# Altium PCB USB2aer_def.PCBDOC (part 2 of 3)
Units mm, origin at the board's own origin, x right, y up, seen from the top; angles counter-clockwise.
Board outline 194.75 x 143.65 mm, 2 copper layers (TopLayer, BottomLayer); 106 components, 195 nets, 863 pads, 225 vias.
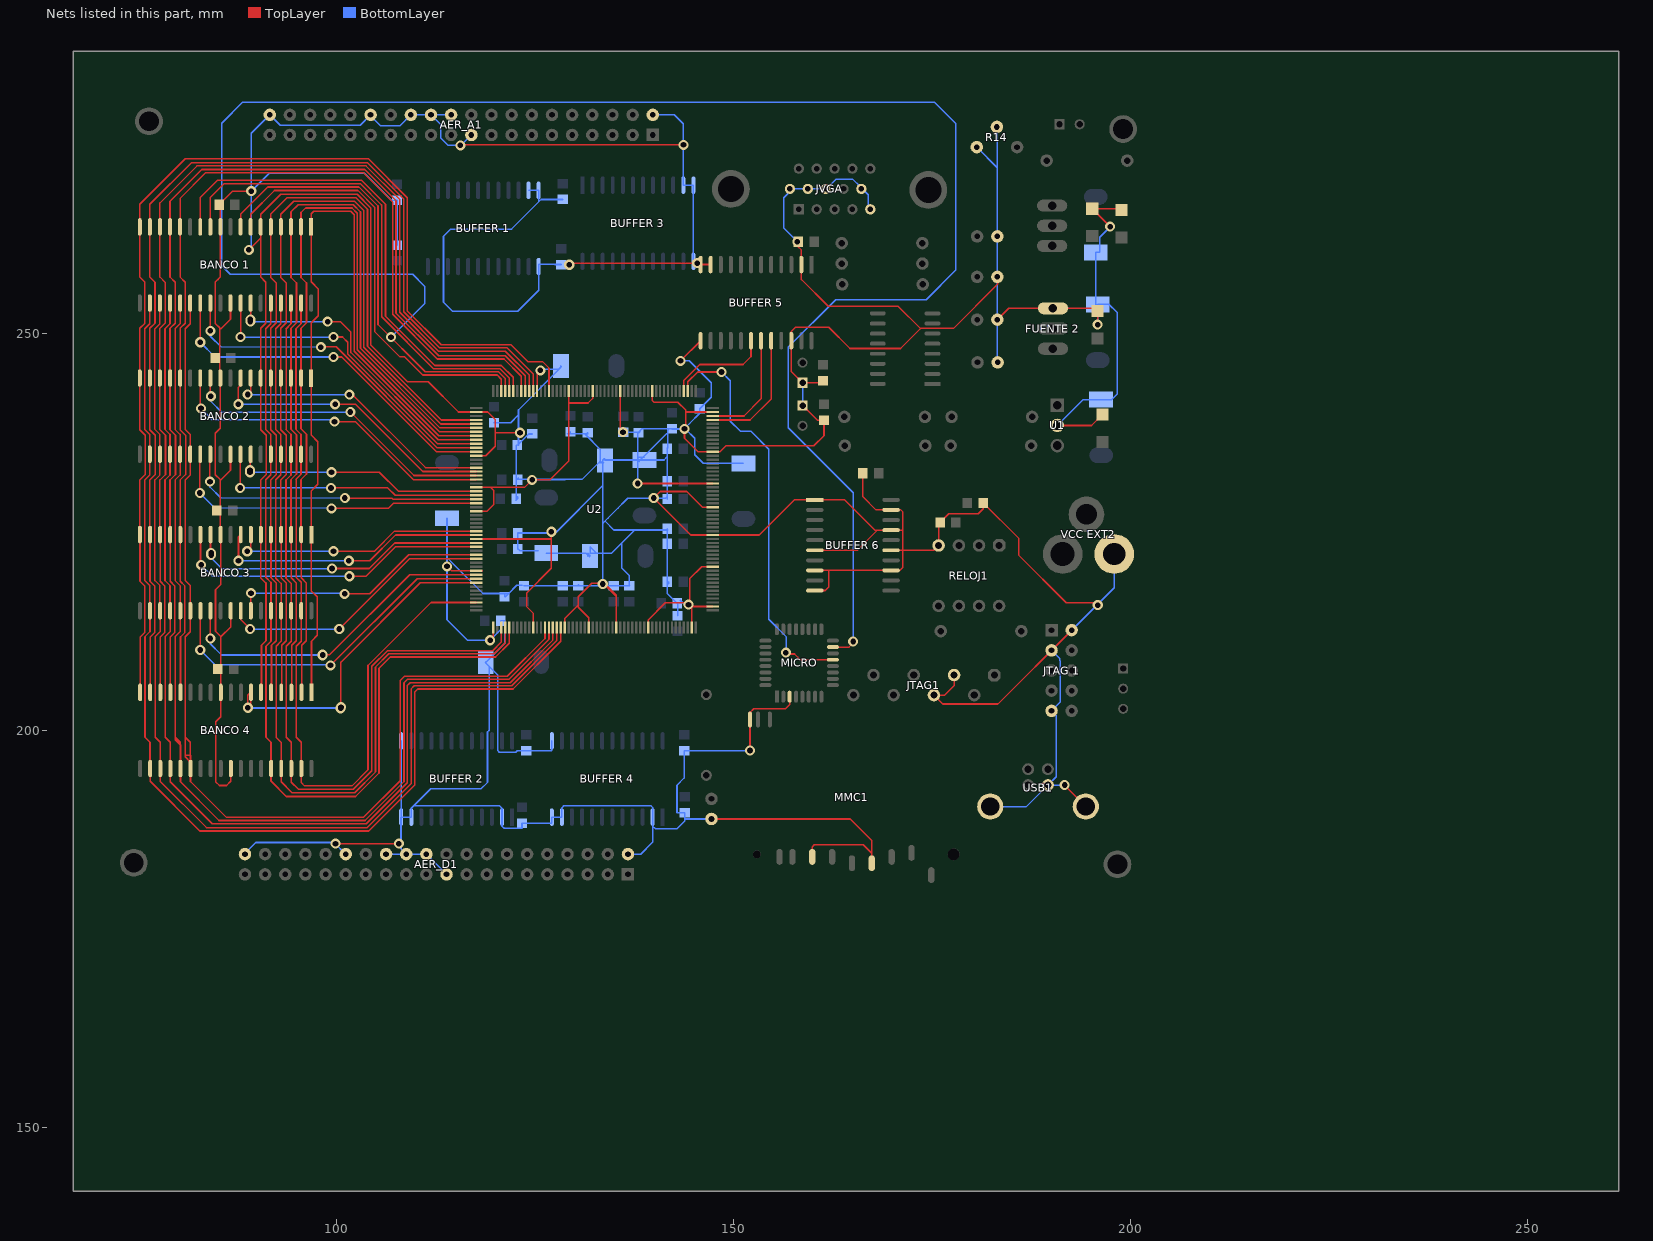
[diagram p2: the nets of this part, all layers, seen from the top]

## Via types
v1: diameter 1.27, hole 0.711, TopLayer to BottomLayer, 225 vias

## Nets (pads, with @x,y where several pads share a name; then routed paths per layer and width w, separated by ;. In a path a pad name is that pad's centre, name@x,y a point inside that pad or via, vN(x,y) a via of type N, cw(c..) or ccw(c..) an arc to the next point about the centre after c; other vN are vias at no path point) (continued)
GND: "BANCO 1.6" "BANCO 1.10" "BANCO 1.28" "BANCO 2.6" "BANCO 2.10" "BANCO 2.28" "BANCO 3.6" "BANCO 3.10" "BANCO 3.28" "BANCO 4.6" "BANCO 4.10" "BANCO 4.28" "BUFFER 1.11" "BUFFER 1.12" "BUFFER 1.13" "BUFFER 2.2" "BUFFER 2.11" "BUFFER 2.12" "BUFFER 2.13" "BUFFER 3.11" "BUFFER 3.12" "BUFFER 3.13" "BUFFER 4.2" "BUFFER 4.11" "BUFFER 4.12" "BUFFER 4.13" "BUFFER 5.2" "BUFFER 5.11" "BUFFER 5.12" "BUFFER 5.13" "BUFFER 5.22" "BUFFER 6.1" "BUFFER 6.6" "BUFFER 6.8" "BUFFER 6.10" "BUFFER 6.13" "BUFFER 6.15" "BUFFER 6.17" "BUFFER 6.19" "C ADJ1.2" "FUENTE 2.1" "JTAG 1.2" "JTAG 1.3" "JTAG 1.9" "RESET FPGA1.1" "VCC EXT2.2" AER_A1.2 AER_A1.19 AER_A1.22 AER_A1.24 AER_A1.26 AER_A1.30 AER_A1.40 AER_D1.2 AER_D1.19 AER_D1.22 AER_D1.24 AER_D1.26 AER_D1.30 AER_D1.40 C2G1.2 C2G2.2 C2G3.2 C2G4.2 C2P1.2 C2P2.2 C2P3.2 C2P4.2 C2P5.2 C2P6.2 C2P7.2 C2P8.2 C2P9.2 C2P10.2 C2P11.2 C2P12.2 C3G1.2 C3G2.2 C3G3.2 C3G4.2 C3P1.2 C3P2.2 C3P3.2 C3P4.2 C3P5.2 C3P6.2 C3P7.2 C3P8.2 C3P9.2 C3P10.2 C3P11.2 C3P12.2 C3P13.2 C3P14.2 C3P15.2 C3P16.2 C6.2 C48.2 C49.2 C50.2 C51.2 C52.2 C53.2 C54.2 C55.2 C56.2 C57.2 C58.2 C59.2 C60.2 C61.2 C62.2 C63.2 C64.2 C65.2 C66.2 C67.2 C68.2 C69.2 C70.2 D1.K D2.K D3.K D4.K D5.K JTAG1.3 JTAG1.4 JVGA.5 JVGA.6 JVGA.7 JVGA.8 JVGA.10 MICRO.3 MMC1.3 MMC1.6 MMC1.10 R14.1 R14.3 RELOJ1.4 RESET1.1 U1.3 U2.1 U2.11 U2.19 U2.25 U2.32 U2.40 U2.51 U2.54 U2.64 U2.72 U2.79 U2.85 U2.93 U2.103 U2.116 U2.124 U2.131 U2.137 U2.145 U2.158 U2.169 U2.177 U2.183 U2.190 U2.198 USB1.4 USB1.5 USB1.6 | length 1483.3
  TopLayer w0.2: 115.716,220.116 U2.198@118.309,220.116 ; U2.190@117.595,224.116 126.316,224.116 ; U2.183@117.595,227.616 118.941,227.616 119.8,228.475 119.8,230.225 119.409,230.616 ; U2.177@117.595,230.616 119.409,230.616 ; U2.169@117.595,234.616 118.791,234.616 119.975,235.8 119.975,237.5 ; U2.158@117.595,240.116 119.034,240.116 119.975,239.175 119.975,237.5 ; v1(123.1,237.5) 119.975,237.5 ; v1@124.6,231.6 v1@124.624,231.624 ; v1(124.625,231.575) 124.6,231.55 123.666,230.616 119.409,230.616 ; U2.11@124.745,212.966 124.745,214.78 123.925,215.6 123.925,217.275 125.475,218.825 ; U2.145@125.245,242.766 125.245,244.955 125.245,245.364 125.245,245.53 v1@125.275,245.5 ; 125.475,218.85 127.05,220.425 127.05,224.116 127.05,224.85 127.1,224.9 127.137,224.937 v1@127.15,224.95 ; v1@127.05,224.95 v1(127.05,225.025) ; U2.19@128.745,212.966 128.745,214.095 130.45,215.8 ; 129.245,236.245 129.245,241.25 U2.137@129.245,242.766 ; U2.25@131.745,212.966 131.745,214.205 130.45,215.5 130.45,215.8 ; v1@133.225,218.625 133.475,218.625 133.588,218.513 135.245,216.855 U2.32@135.245,212.966 ; v1@133.25,218.55 132.15,218.55 130.45,216.85 130.45,215.8 ; U2.40@139.245,212.966 139.245,213.92 141.395,216.07 144.325,216.07 144.505,216.07 144.525,216.05 144.7,215.875 144.745,215.83 144.745,215.616 U2.51@144.745,212.966 ; U2.116@139.745,242.766 139.745,241.58 139.975,241.35 142.975,241.35 144,240.325 v1@144,238.075 ; v1@144.5,216.075 144.5,219.125 145.991,220.616 U2.64@147.395,220.616 ; U2.72@147.395,224.616 144.609,224.616 v1(139.95,229.275) 140.775,230.1 144.1,230.1 146.084,228.116 U2.79@147.395,228.116
  TopLayer w0.203: C61.2@84.675,246.925 C61.2@85.25,246.925 ; 84.709,233.172 84.709,237.439 85.345,238.075 85.345,244.4 85.25,244.495 C61.2@85.25,246.925 ; C62.2@84.875,227.7 85.344,227.7 85.344,231.572 84.7,232.216 84.7,232.22 ; C63.2@85,207.725 C63.2@85.37,207.725 ; C60.2@85.1,266.25 85.137,266.213 C60.2@85.345,266.005 ; C60.2@85.175,266.25 86.87,267.945 v1(89.23,267.945) ; 85.25,250.75 85.25,250.72 ; 85.325,238.075 84.7,237.45 84.7,232.22 ; 85.325,257.125 84.7,256.5 ; 85.345,231.605 85.345,231.575 ; C60.2@85.345,266.08 C60.2@85.345,266.005 ; C60.2@85.345,266.25 C60.2@85.345,266.294 ; 85.37,205.625 C63.2@85.37,207.725 ; 85.37,211.88 85.37,211.85 ; 86.615,234.8 86.615,232.765 85.425,231.575 85.403,231.597 85.367,231.597 85.345,231.575 ; 86.615,253.85 86.615,251.815 85.425,250.625 85.345,250.625 85.25,250.72 ; 86.64,215.075 86.64,213.04 85.391,211.791 ; 86.661,195.197 86.661,193.586 86.125,193.05 85.225,193.05 84.775,193.5 84.775,201.1 85.391,201.716 85.391,204.797 85.391,207.725 85.391,211.791 ; v1@89.025,260.65 90.425,262.05 ; 90.425,225.3 90.425,231.555 91.12,232.25 91.12,237.2 90.425,237.895 90.425,244.35 ; 90.425,244.4 90.425,250.655 91.075,251.305 91.075,256.475 90.425,257.125 90.425,262.05 ; 90.45,224.675 90.45,219.17 91.095,218.525 ; 90.471,204.797 90.52,204.797 90.52,210.725 91.095,211.3 91.095,218.525 ; 91.095,218.575 91.095,218.525 ; v1(99.85,185.725) v1(107.825,185.725) ; v1(113.9,220.675) 114.459,220.116 U2.198@117.575,220.116 ; v1@115.65,273.775 v1(143.7,273.775) ; U2.190@117.595,224.116 127.05,224.116 ; U2.158@117.7,240.116 U2.158@117.595,240.116 115.35,240.116 111.521,243.945 108.911,243.945 104.3,248.556 104.3,265.825 102.575,267.55 92.95,267.55 90.425,265.025 90.425,263.45 90.425,262.05 ; v1(119.329,211.353) 119.745,211.769 U2.1@119.745,212.966 ; v1@124.6,231.55 124.6,231.575 v1@124.6,231.597 ; v1@124.6,231.6 v1@124.6,231.597 ; v1@125.245,244.955 v1(125.654,245.364) 125.411,245.364 v1@125.245,245.53 ; 125.475,218.825 125.475,218.85 ; v1@127.05,224.95 v1@127.1,224.9 ; v1@127.138,224.938 v1@127.142,224.942 ; U2.137@129.245,242.766 129.245,241.25 ; v1@129.325,258.85 v1@145.45,258.85 ; U2.131@132.245,242.766 132.245,241.82 131.675,241.25 129.245,241.25 ; v1@133.225,218.625 v1@133.25,218.6 ; v1@133.528,218.745 133.674,218.599 135.245,217.028 135.245,216.855 U2.32@135.245,212.966 ; U2.124@135.745,242.766 135.745,237.88 v1@136.1,237.525 ; v1(137.925,231.116) U2.85@147.395,231.116 ; v1@143.3,246.545 145.855,249.1 ; v1@143.919,237.975 143.967,238.023 143.977,238.023 v1@144,238 ; v1@143.975,238.15 v1(143.823,237.998) 143.823,236.827 145.534,235.116 148.301,235.116 148.678,235.493 149.049,235.864 160.122,235.864 161.4,237.143 C6.2@161.4,239.1 160.55,239.1 158.725,240.925 ; 144,240.1 144.016,240.116 U2.103@147.395,240.116 ; v1(144.325,215.85) 144.559,215.616 144.745,215.616 U2.54@147.395,215.616 ; v1@145.855,258.7 147.125,258.7 ; D1.K@147.225,188.835 164.721,188.835 167.425,186.131 167.425,184.506 ; U2.72@147.395,224.616 153.238,224.616 157.672,229.05 163.978,229.05 167.788,225.24 171.335,225.24 ; v1(152.07,197.46) 152.075,197.465 MMC1.10@152.075,201.375 152.075,202.25 152.55,202.725 156.55,202.725 157.075,203.25 MICRO.3@157.075,204.25 ; C48.2@158.175,261.575 158.175,260.908 158.555,260.528 158.555,256.82 161.925,253.45 170.74,253.45 173.557,250.632 ; MMC1.6@159.925,184.065 159.925,185.318 160.179,185.572 166.358,185.572 167.425,184.506 ; 160.25,217.62 161.545,217.62 162.025,218.1 162.025,220.16 ; 160.25,220.16 169.85,220.16 170.96,220.16 171.35,220.55 171.35,227.524 171.094,227.78 167.959,227.78 166.275,229.464 C55.2@166.275,232.4 ; 160.25,222.7 165.6,222.7 165.699,222.799 168.14,225.24 ; C51.2@161.277,243.891 C51.2@161.277,244.053 161.024,243.8 RESET1.1@158.7,243.8 157.285,245.215 157.285,250.26 157.825,250.8 162,250.8 164.675,248.125 171.05,248.125 173.575,250.65 177.725,250.65 183.275,256.2 D4.K@183.275,257.15 ; MMC1.3@167.425,183.265 167.425,184.506 ; 169.85,222.7 175.255,222.7 RELOJ1.4@175.855,223.3 175.855,226.03 C64.2@176.025,226.2 177.107,227.282 180.832,227.282 181.475,227.925 181.475,228.675 181.488,228.662 185.921,224.229 185.921,222.087 191.925,216.083 195.592,216.083 v1(195.9,215.775) ; JTAG1.3@177.795,206.975 177.795,205.638 176.592,204.435 JTAG1.4@175.255,204.435 176.363,203.327 183.317,203.327 192.615,212.625 ; D3.K@183.24,251.75 184.665,253.175 190.25,253.175 195.529,253.175 C66.2@195.875,252.829 195.885,252.829 v1(195.885,251.13) ; U1.3@190.8,238.425 195.121,238.425 C69.2@196.475,239.779 ; v1@191.68,193.11 USB1.6@194.39,190.4 ; v1(197.46,263.469) 195.2,265.729 196.317,265.729 196.322,265.735 198.875,265.735 C65.2@198.875,265.554 ; 84.7,232.22 85.345,231.575 ; 84.7,256.5 84.7,251.27 85.25,250.72 ; 84.7,256.5 85.019,256.819 85.039,256.819 85.345,257.125 85.345,263.45 C60.2@85.345,266.005 ; C61.2@85.25,246.925 85.25,250.72 ; 85.345,231.575 85.345,227.7 85.345,225.35 85.37,225.325 85.37,224.675 85.37,218.35 85.35,218.35 84.725,217.725 84.725,212.495 85.37,211.85 ; C63.2@85.37,207.725 85.37,211.77 ; 85.37,211.77 85.391,211.791 ; 85.37,211.77 85.37,211.85 ; 85.37,211.85 85.391,211.829 85.391,211.791 ; v1@124.6,231.597 124.625,231.597 126.924,231.597 126.924,231.623 129.245,233.944 129.245,241.25
  BottomLayer w0.2: AER_D1.40@88.44,184.4 88.44,184.515 89.8,185.875 99.665,185.875 AER_D1.30@101.14,184.4 ; v1(88.925,260.55) 89.23,260.855 v1(89.23,267.945) ; 91.565,270.225 103.483,270.225 106.883,266.825 C49.2@107.6,266.825 107.6,263.982 C57.2@107.6,261.15 ; 91.565,270.279 v1(89.23,267.945) ; AER_D1.30@101.17,184.37 AER_D1.30@101.175,184.375 ; AER_D1.26@106.22,184.4 AER_D1.24@108.76,184.4 ; 108.1,189.075 108.1,185.06 AER_D1.24@108.76,184.4 ; 108.13,189.052 109.4,189.052 109.4,189.075 109.4,190.195 109.705,190.5 ; 108.13,189.075 108.13,198.675 ; AER_A1.24@111.885,277.565 113.1,276.35 113.1,274.65 114.025,273.725 v1(115.575,273.725) ; AER_D1.19@113.84,181.86 AER_D1.22@111.3,184.4 AER_D1.24@108.76,184.4 ; 113.9,222.75 113.9,213.925 116.444,211.381 v1@119.357,211.381 ; AER_A1.22@114.35,277.565 AER_A1.22@114.388,277.603 ; AER_A1.22@114.425,277.565 AER_A1.26@109.345,277.565 107.975,276.195 105.505,276.195 104.265,277.435 AER_A1.30@104.265,277.565 102.95,276.25 92.88,276.25 AER_A1.40@91.565,277.565 89.23,275.23 v1(89.23,267.945) ; 114.917,220.758 118.429,217.246 C3P13.2@121.15,217.246 ; v1@115.665,273.725 AER_A1.19@116.965,275.025 ; C2G1.2@118.775,208.625 C2G1.2@118.775,208.55 ; v1(119.329,211.353) 120.675,212.699 C3P14.2@120.675,213.825 121.15,213.825 121.15,210.925 118.813,208.587 118.8,208.575 C2G1.2@118.775,208.55 ; C3P1.2@119.825,238.775 121.92,238.775 122.911,239.766 ; C3P1.2@119.85,238.8 C3P1.2@119.975,238.925 ; C3P15.2@122.575,228.975 122.7,229.1 122.825,229.225 122.825,229.425 C3P15.2@122.6,229.2 ; C3P15.2@122.6,229.125 C3P15.2@122.6,229.2 ; C3P16.2@122.775,235.95 122.6,235.95 122.6,231.6 C3P15.2@122.6,229.2 ; C2P10.2@122.825,222.85 122.825,222.87 C2P10.2@122.84,222.885 ; C2P12.2@122.875,231.8 122.75,231.675 122.7,231.625 122.825,231.625 123.746,231.625 ; C3P16.2@122.875,235.95 122.875,236.025 C3P16.2@122.911,236.061 ; C3P16.2@122.911,235.95 C3P16.2@122.911,236.061 ; v1(123.1,237.5) 123.15,237.55 v1@123.15,237.5 ; C3P12.2@123.35,218.275 122.7,218.275 C3P13.2@121.671,217.246 ; C3P12.2@123.6,218.2 C2P9.2@128.475,218.2 C3P11.2@130.425,218.2 ; 124.175,268.05 124.175,268.046 125.445,268.046 ; v1(124.625,231.575) 127.784,231.575 ; C3P2.2@124.65,237.35 124.2,237.35 C3P16.2@122.911,236.061 ; v1@125.125,245.35 v1@125.269,245.494 ; v1@125.225,245.575 v1@125.263,245.537 ; v1@125.269,245.364 v1@125.269,245.494 ; v1@125.275,245.5 v1@125.269,245.494 ; C3G1.2@125.4,222.625 123.1,222.625 122.85,222.875 C2P10.2@122.84,222.885 ; 125.445,266.593 125.445,268.046 ; 125.445,268.05 125.445,268.046 ; v1@125.575,245.425 125.584,245.434 v1@125.65,245.5 ; v1@126.009,245.72 v1@125.79,245.5 ; C3G1.2@126.399,222.334 131.416,222.334 C3G4.2@131.641,222.109 ; v1(127.05,225.025) 127.1,224.975 v1@127.65,224.975 ; 127.105,198.675 127.105,197.45 C58.2@123.9,197.45 122.749,197.45 122.555,197.256 120.498,197.256 120.269,197.485 120.269,207.006 C2G1.2@119.228,208.047 ; 127.762,231.597 127.784,231.575 ; C2G3.2@128.245,245.925 C2G3.2@128.245,245.795 ; C56.2@128.275,258.7 127.457,258.7 127.433,258.724 125.445,258.724 125.445,258.45 125.445,255.448 122.803,252.806 114.605,252.806 113.462,253.949 113.462,262.255 114.376,263.169 122.022,263.169 125.752,266.9 C50.2@128.475,266.9 ; C2G3.2@128.3,245.85 C2G3.2@128.245,245.795 ; 128.375,189.075 128.375,189.078 ; C2P1.2@129.025,237.375 C2P1.2@129.45,237.375 ; C2P1.2@129.45,237.625 C2P1.2@129.45,237.375 ; C3P11.2@130.45,218.225 C3P11.2@130.425,218.2 ; C3P11.2@130.475,218.375 130.425,218.375 C3P11.2@130.425,218.2 ; C3P3.2@131.6,237.525 C3P3.2@131.625,237.525 131.625,237.35 131.6,237.375 C3P3.2@131.255,237.375 ; C3G4.2@131.641,221.975 C3G4.2@131.641,222.109 ; C3G4.2@131.875,221.875 131.838,221.913 C3G4.2@131.641,222.109 ; C3G4.2@131.925,222.05 131.641,222.334 C3G4.2@131.641,222.109 ; v1@133.25,218.55 v1@133.25,218.6 ; C3G2.2@133.375,233.775 C3G2.2@133.225,233.925 ; v1@133.528,218.745 133.528,222.325 ; C3G2.2@133.675,233.7 C3G2.2@133.528,233.7 ; C3G2.2@133.8,234.025 133.8,234.075 C3G3.2@137.925,234.075 ; C3G2.2@133.8,234.25 133.725,234.25 133.65,234.175 133.528,234.053 133.528,234.025 C3G2.2@133.528,233.7 ; 135.941,223.52 135.941,220.416 136.85,219.507 C2P7.2@136.85,218.2 ; C2P2.2@136.1,237.575 138.025,237.575 C2P3.2@138.05,237.575 ; AER_D1.2@136.7,184.4 138.305,184.4 139.805,185.9 139.805,187.96 ; C2P7.2@136.95,218.2 C2P7.2@136.85,218.2 ; v1(137.925,231.116) C3G3.2@137.925,234.075 ; C3G3.2@138.1,233.875 138.075,233.9 C3G3.2@138.25,234.075 ; C2P3.2@138.11,237.515 138.063,237.562 C2P3.2@138.05,237.575 ; C2P3.2@138.175,237.575 C2P3.2@138.05,237.575 ; C3G3.2@138.775,234.425 C3G3.2@138.6,234.425 ; AER_A1.2@139.825,277.565 142.535,277.565 143.675,276.425 143.675,268.7 144.945,268.7 v1@144.945,259.1 ; 140.919,225.247 137.547,225.247 ; 141.563,237.388 C3G3.2@138.6,234.425 ; C2P5.2@141.65,225.4 C2P5.2@141.65,225.25 ; C3P7.2@141.65,229.15 141.656,229.15 C2P4.2@141.656,231.4 ; C2P4.2@141.65,231.4 C2P4.2@141.655,231.4 ; C3P4.2@141.8,237.875 141.7,237.775 141.7,235.6 141.655,235.555 C3P6.2@141.655,235.486 141.655,234.493 ; C3P8.2@141.834,218.725 141.834,218.466 C3P8.2@141.65,218.65 ; C3P4.2@142.125,238 C2P3.2@138.475,238 ; C3P4.2@142.25,237.975 143.95,237.975 145.125,236.8 145.125,234.725 146.2,233.65 C2G4.2@151.15,233.65 ; C3P4.2@142.25,238.025 138.5,238.025 C2P3.2@138.475,238 ; C3P10.2@142.95,214.475 142.95,216.025 142.979,216.054 C3P9.2@143,216.075 ; C3P9.2@143.282,216.382 143.589,216.075 ; v1(143.319,246.564) 144.436,246.564 147.2,243.8 147.2,241.975 C3P5.2@145.75,240.525 145.75,239.95 144.46,238.66 144,238.2 v1@144,238.075 ; v1(143.823,237.998) 138.477,237.998 C2P3.2@138.475,238 ; v1@143.919,237.975 v1@143.967,238.023 ; v1@144.245,215.419 144.069,215.595 144.045,215.62 143.589,216.075 ; v1@144.5,216.075 144.325,216.075 143.589,216.075 ; D1.K@147.225,188.835 143.85,188.835 ; 149.504,233.65 C2G4.2@151.25,233.65 ; v1(152.07,197.46) 152.06,197.45 C54.2@143.775,197.45 143.775,193.991 142.875,193.091 142.875,189.625 C53.2@143.85,189.625 143.85,188.835 ; v1(158.05,261.575) 156.325,263.3 156.325,267.125 157.425,268.225 159.55,268.225 161.675,268.225 162.875,269.425 165.05,269.425 165.925,268.55 166.988,267.487 JVGA.5@166.988,265.662 ; RESET1.1@158.7,243.8 RESET1.1@158.75,243.75 ; 158.725,240.925 RESET1.1@158.725,243.675 ; R14.1@180.075,273.525 R14.1@180.1,273.525 ; R14.1@180.65,273.5 183.24,270.91 ; R14.3@183.24,275.465 D4.K@183.24,257.15 183.24,246.46 D2.K@183.275,246.425 ; USB1.4@189.62,193.11 190.678,194.168 190.678,201.862 190.075,202.465 191.186,203.576 191.186,208.737 191.135,208.788 191.135,209.025 190.075,210.085 ; 190.25,253.175 192.227,253.175 ; 190.3,253.175 190.825,253.7 ; U1.3@190.8,238.425 194.05,241.675 197.625,241.675 198.35,242.4 198.35,252.65 197.3,253.7 C68.2@195.9,253.7 ; 192.615,212.625 195.833,215.842 197.975,217.985 197.975,222.1 ; v1(195.885,251.13) C68.2@195.885,253.65 ; C68.2@195.9,253.65 195.631,253.65 195.631,259.207 195.65,259.207 C67.2@195.65,260.225 196.139,260.225 196.139,262.149 v1(197.46,263.469) ; 197.975,222.25 197.975,222.225 197.975,222.1 ; 198,222.075 197.975,222.1 ; 109.705,190.5 120.525,190.5 120.83,190.195 120.83,189.075 120.83,187.932 121.107,187.655 123.35,187.655 C52.2@123.35,188.3 125.949,188.3 125.959,188.29 127.105,188.29 127.105,189.075 127.105,189.078 128.375,189.078 ; 109.705,190.5 111.838,192.634 118.186,192.634 118.999,193.446 118.999,199.796 119.228,200.025 119.228,202.641 C2G1.2@119.228,208.047 ; C2G1.2@118.775,208.5 118.75,208.525 C2G1.2@118.775,208.55 ; C2G1.2@118.775,208.5 C2G1.2@119.228,208.047 ; C2G1.2@118.775,208.5 C2G1.2@118.775,208.55 ; C3P13.2@121.15,217.246 C3P13.2@121.671,217.246 ; C3P13.2@121.15,217.246 C3P13.2@121.15,216.85 121.275,216.85 C3P13.2@121.671,217.246 ; C2P10.2@122.84,222.885 122.825,222.9 C2P11.2@122.825,224.875 127.05,224.875 127.55,224.875 v1@127.65,224.975 ; C3P16.2@122.911,236.061 122.911,237.5 122.911,239.766 ; 122.911,239.766 122.911,240.385 C2G3.2@128.245,245.72 ; 123.746,231.625 123.749,231.623 v1@124.181,231.623 ; 123.746,231.625 v1@124.178,231.625 ; v1@124.178,231.625 v1@124.181,231.623 ; v1@124.178,231.625 124.625,231.625 128.775,231.625 128.773,231.623 ; v1@124.181,231.623 124.625,231.623 128.773,231.623 ; v1@125.263,245.537 v1@125.3,245.5 ; v1@125.263,245.537 125.287,245.512 v1@125.3,245.5 ; v1@125.3,245.5 v1@125.65,245.5 ; v1@125.3,245.5 125.436,245.364 v1(125.654,245.364) v1@125.79,245.5 ; v1@125.65,245.5 125.654,245.5 v1@125.79,245.5 ; v1@125.79,245.5 127.95,245.5 C2G3.2@128.17,245.72 ; v1@127.65,224.975 133.528,230.853 ; 127.784,231.575 128.725,231.575 128.773,231.623 ; C2G3.2@128.17,245.72 C2G3.2@128.245,245.72 ; C2G3.2@128.17,245.72 C2G3.2@128.245,245.795 ; C2G3.2@128.245,245.72 C2G3.2@128.245,245.795 ; 128.375,189.078 128.375,190.249 128.626,190.5 139.598,190.5 139.805,190.293 139.805,189.075 139.805,187.96 ; 128.773,231.623 130.923,231.623 C3G2.2@133,233.7 ; C2P1.2@129.45,237.375 C3P3.2@131.255,237.375 ; C3P11.2@130.425,218.2 133.525,218.2 C2P8.2@134.9,218.2 C2P7.2@136.85,218.2 ; C3P3.2@131.255,237.375 131.365,237.265 133.225,235.405 133.225,234.025 C3G2.2@133.225,233.925 ; C3G4.2@132.725,222.325 132.488,222.562 131.925,223.125 131.925,222.35 131.95,222.325 C3G4.2@132.725,222.325 ; C3G4.2@132.725,222.325 133.528,222.325 ; C3G2.2@133,233.7 C3G2.2@133.528,233.7 ; C3G2.2@133,233.7 C3G2.2@133.225,233.925 ; 133.528,222.325 134.625,222.325 137.547,225.247 ; 133.528,222.325 133.528,226.103 ; 133.528,226.103 133.8,226.375 ; 133.528,226.103 133.528,230.853 ; 133.528,230.853 C3G2.2@133.528,233.7 ; 133.8,226.375 133.8,226.372 134.925,225.247 137.547,225.247 ; 133.8,226.375 134.181,226.756 135.451,228.026 136.357,228.932 136.675,229.25 139.95,229.25 141.425,229.25 141.487,229.312 141.655,229.48 C2P4.2@141.655,231.4 ; 137.547,225.247 137.55,225.25 C2P5.2@141.65,225.25 ; C3G3.2@137.925,234.075 C3G3.2@138.25,234.075 ; C3G3.2@137.925,234.075 C3G3.2@137.925,234.25 ; C3G3.2@137.925,234.25 138.1,234.425 C3G3.2@138.6,234.425 ; C3G3.2@137.925,234.25 137.925,237.45 138.013,237.537 C2P3.2@138.05,237.575 ; C2P3.2@138.05,237.575 C2P3.2@138.475,238 ; C3G3.2@138.25,234.075 138.512,234.337 C3G3.2@138.6,234.425 ; C3G3.2@138.25,234.075 C3G3.2@138.775,234.075 141.237,234.075 141.655,234.493 ; 139.805,187.96 140.161,187.604 142.885,187.604 143.85,188.57 143.85,188.835 ; C3P8.2@141.65,218.65 C3P8.2@141.65,218.725 C2P6.2@141.65,223.525 C2P5.2@141.65,225.175 ; C3P8.2@141.65,218.65 141.65,217.25 142.825,216.075 142.925,216.075 C3P9.2@143,216.075 ; C2P5.2@141.65,225.175 141.725,225.25 C2P5.2@141.65,225.25 ; C2P5.2@141.65,225.175 C2P5.2@141.65,225.25 ; C2P4.2@141.655,231.4 141.655,234.493 ; C3P9.2@143,216.075 143.589,216.075
  BottomLayer w0.203: 113.9,221.775 114.725,220.95 114.912,220.763 ; 113.9,222.75 C2G2.2@113.9,226.725 ; USB1.5@182.35,190.4 186.91,190.4 USB1.4@189.62,193.11 v1@191.68,193.11
  other v1: 191.725,193.125 133.525,218.45 136.075,237.575 129.3,258.675 145.425,258.875
INIT: MICRO.13 U2.107 | length 51.5
  TopLayer w0.203: U2.107@144.245,242.766 144.245,243.915 145.491,245.161 v1(148.488,245.161) ; v1@156.769,209.631 157.694,209.631 158.425,208.9 MICRO.13@162.525,208.9
  BottomLayer w0.2: v1(148.488,245.161) 149.606,244.043 149.606,238.963 150.876,237.693 152.197,237.693 154.457,235.433 154.457,213.993 156.625,211.825 156.625,209.825 v1(156.6,209.8)
LED2: "BUFFER 5.18" U2.108 | length 13
  TopLayer w0.203: U2.108@143.745,242.766 143.745,244.095 145.75,246.1 151.2,246.1 152.205,247.105 152.205,249.1
LED3: "BUFFER 5.19" U2.102 | length 14.3
  TopLayer w0.203: U2.102@147.395,239.616 151.316,239.616 153.475,241.775 153.475,249.1
LED4: "BUFFER 5.20" U2.101 | length 15.8
  TopLayer w0.203: U2.101@147.395,239.116 152.091,239.116 154.745,241.77 154.745,249.1
MEM_A0: "BANCO 1.1" "BANCO 2.1" "BANCO 3.1" "BANCO 4.1" U2.164 | length 105.1
  TopLayer w0.203: 96.821,204.797 96.821,211.246 97.55,211.975 97.55,216.825 96.8,217.575 96.8,224.675 96.8,230.175 97.625,231 97.625,236.375 96.775,237.225 96.775,244.4 96.775,251.35 97.675,252.25 97.675,255.625 96.775,256.525 96.775,263.45 96.775,265.1 97.097,265.422 101.758,265.422 102.197,264.983 102.197,247.778 112.875,237.116 U2.164@117.595,237.116
MEM_A1: "BANCO 1.2" "BANCO 2.2" "BANCO 3.2" "BANCO 4.2" U2.163 | length 106.3
  TopLayer w0.203: 95.551,204.797 95.6,204.797 95.6,210.725 96.175,211.3 96.175,218.575 95.53,219.22 95.53,224.675 95.53,225.35 95.505,225.35 95.505,231.605 96.2,232.3 96.2,237.325 95.505,238.02 95.505,244.4 95.505,250.655 96.2,251.35 96.2,256.375 95.505,257.07 95.505,263.45 95.505,265.255 96.075,265.825 101.925,265.825 102.6,265.15 102.6,247.975 ; 102.6,247.95 102.6,247.975 ; U2.163@117.595,237.616 112.959,237.616 102.6,247.975
MEM_A2: "BANCO 1.3" "BANCO 2.3" "BANCO 3.3" "BANCO 4.3" U2.162 | length 107.7
  TopLayer w0.203: 94.281,204.797 94.33,204.797 94.33,210.725 94.905,211.3 94.905,218.575 94.26,219.22 94.26,224.675 94.26,225.35 94.235,225.35 94.235,231.605 94.93,232.3 94.93,237.25 94.235,237.945 94.235,244.4 94.235,250.655 94.93,251.35 94.93,256.375 94.235,257.07 94.235,263.45 94.235,265.335 95.15,266.25 102.075,266.25 103.003,265.322 103.003,248.142 113.029,238.116 U2.162@117.595,238.116
MEM_A3: "BANCO 1.4" "BANCO 2.4" "BANCO 3.4" "BANCO 4.4" U2.161 | length 109
  TopLayer w0.203: 93.011,204.797 93.06,204.797 93.06,210.725 93.635,211.3 93.635,218.575 92.99,219.22 92.99,224.675 92.99,225.3 92.965,225.3 92.965,231.555 93.66,232.25 93.66,237.2 92.965,237.895 92.965,244.4 92.965,250.655 93.66,251.35 93.66,256.375 92.965,257.07 92.965,263.45 92.965,265.04 94.6,266.675 102.25,266.675 103.425,265.5 103.425,248.29 113.108,238.608 U2.161@117.587,238.608
MEM_A4: "BANCO 1.5" "BANCO 2.5" "BANCO 3.5" "BANCO 4.5" U2.160 | length 110.4
  TopLayer w0.203: 91.741,204.797 91.79,204.797 91.79,210.725 92.365,211.3 92.365,218.575 91.72,219.22 91.72,224.675 91.72,225.3 91.695,225.3 91.695,231.555 92.39,232.25 92.39,237.2 91.695,237.895 91.695,244.4 91.695,250.655 92.39,251.35 92.39,256.375 91.695,257.07 91.695,263.45 91.695,265.07 93.725,267.1 102.425,267.1 103.875,265.65 103.875,248.411 113.17,239.116 U2.160@117.595,239.116
MEM_A5: "BANCO 1.14" "BANCO 2.14" "BANCO 3.14" "BANCO 4.14" U2.149 | length 128.9
  TopLayer w0.203: 80.311,204.797 80.311,211.771 80.875,212.335 80.875,218.205 80.29,218.79 80.29,224.675 80.29,225.3 80.265,225.3 80.265,231.555 80.96,232.25 80.96,237.2 80.265,237.895 80.265,244.4 80.265,250.655 80.915,251.305 80.915,256.475 80.265,257.125 80.265,263.45 80.265,267.035 83.48,270.25 103.375,270.25 107.05,266.575 107.05,252.426 112.685,246.791 121.084,246.791 123.245,244.63 U2.149@123.245,242.766
MEM_A6: "BANCO 1.15" "BANCO 2.15" "BANCO 3.15" "BANCO 4.15" U2.148 | length 130.9
  TopLayer w0.203: 79.041,204.797 79.041,211.771 79.605,212.335 79.605,218.205 79.02,218.79 79.02,224.675 79.02,225.3 78.995,225.3 78.995,231.555 79.69,232.25 79.69,237.2 78.995,237.895 78.995,244.4 78.995,250.655 79.645,251.305 79.645,256.475 78.995,257.125 78.995,263.45 78.995,266.67 83,270.675 103.55,270.675 107.475,266.75 107.475,252.571 112.852,247.194 121.256,247.194 123.745,244.705 U2.148@123.745,242.766
MEM_A7: "BANCO 1.16" "BANCO 2.16" "BANCO 3.16" "BANCO 4.16" U2.147 | length 133
  TopLayer w0.203: 77.771,204.797 77.771,211.771 78.335,212.335 78.335,218.205 77.75,218.79 77.75,224.675 77.75,225.3 77.725,225.3 77.725,231.555 78.42,232.25 78.42,237.2 77.725,237.895 77.725,244.4 77.725,250.655 78.375,251.305 78.375,256.475 77.725,257.125 77.725,263.45 77.725,266.45 82.4,271.125 103.7,271.125 107.9,266.925 107.928,266.897 107.928,252.689 112.825,247.791 121.234,247.791 124.245,244.78 U2.147@124.245,242.766
MEM_A8: "BANCO 1.17" "BANCO 2.17" "BANCO 3.17" "BANCO 4.17" U2.146 | length 135.1
  TopLayer w0.203: 76.501,204.797 76.501,211.771 77.065,212.335 77.065,218.205 76.48,218.79 76.48,224.675 76.48,225.3 76.455,225.3 76.455,231.555 77.15,232.25 77.15,237.2 76.455,237.895 76.455,244.4 76.455,250.655 77.105,251.305 77.105,256.475 76.455,257.125 76.455,263.45 76.455,266.28 81.725,271.55 103.85,271.55 108.45,266.95 108.45,252.737 112.992,248.195 121.505,248.195 124.745,244.955 U2.146@124.745,242.766
MEM_A9: "BANCO 1.18" "BANCO 2.18" "BANCO 3.18" "BANCO 4.18" U2.142 | length 139.2
  TopLayer w0.203: 75.231,204.797 75.231,211.771 75.795,212.335 75.795,218.205 75.21,218.79 75.21,224.675 75.21,225.3 75.185,225.3 75.185,231.555 75.88,232.25 75.88,237.2 75.185,237.895 75.185,244.4 75.185,250.655 75.835,251.305 75.835,256.475 75.185,257.125 75.185,263.45 75.185,266.285 80.925,272.025 104,272.025 108.9,267.125 108.9,252.857 113.159,248.598 121.95,248.598 124.073,246.475 125.925,246.475 126.745,245.655 U2.142@126.745,242.766
MEM_A10: "BANCO 1.20" "BANCO 2.20" "BANCO 3.20" "BANCO 4.20" U2.18 | length 133.2
  TopLayer w0.203: 76.455,215.75 76.455,218.245 75.825,218.875 75.825,231.545 76.455,232.175 76.455,234.8 76.455,237.295 75.825,237.925 75.825,250.595 76.455,251.225 76.455,253.85 ; 76.48,196.025 76.48,198.52 75.85,199.15 75.85,211.82 76.48,212.45 76.48,215.075 ; 76.501,195.197 76.501,193.576 82.752,187.325 104.025,187.325 109.825,193.125 109.825,204.825 110.212,205.212 122.212,205.212 128.245,211.245 U2.18@128.245,212.966
MEM_A11: "BANCO 1.21" "BANCO 2.21" "BANCO 3.21" "BANCO 4.21" U2.17 | length 131.1
  TopLayer w0.203: 77.725,215.75 77.725,218.245 77.095,218.875 77.095,231.545 77.725,232.175 77.725,234.8 77.725,237.295 77.095,237.925 77.095,250.595 77.725,251.225 77.725,253.85 ; 77.75,196.025 77.75,198.52 77.12,199.15 77.12,211.82 77.75,212.45 77.75,215.075 ; 77.771,195.197 77.771,193.571 83.592,187.75 103.85,187.75 109.375,193.275 109.375,205.225 109.765,205.615 122.04,205.615 127.745,211.32 U2.17@127.745,212.966
MEM_A12: "BANCO 1.22" "BANCO 2.22" "BANCO 3.22" "BANCO 4.22" U2.16 | length 129.1
  TopLayer w0.203: 78.995,215.75 78.995,218.245 78.365,218.875 78.365,231.545 78.995,232.175 78.995,234.8 78.995,237.295 78.365,237.925 78.365,250.595 78.995,251.225 78.995,253.85 ; 79.02,196.025 79.02,198.52 78.39,199.15 78.39,211.82 79.02,212.45 79.02,215.075 ; 79.041,195.197 79.041,193.516 84.332,188.225 103.725,188.225 108.9,193.4 108.9,205.65 109.268,206.018 121.868,206.018 127.245,211.395 U2.16@127.245,212.966
MEM_A13: "BANCO 1.23" "BANCO 2.23" "BANCO 3.23" "BANCO 4.23" U2.15 | length 144.9
  TopLayer w0.203: 80.265,215.75 80.265,218.245 79.635,218.875 79.635,231.545 80.265,232.175 80.265,234.8 80.265,237.295 79.635,237.925 79.635,250.595 80.265,251.225 80.265,253.85 ; 80.29,196.025 80.29,198.196 ; 80.29,215.075 80.29,212.45 ; U2.15@126.745,212.966 126.745,211.47 121.696,206.421 108.896,206.421 108.475,206 108.475,193.55 103.575,188.65 85.172,188.65 80.311,193.511 80.311,195.197 80.311,198.175 80.29,198.196 ; 79.66,211.82 80.29,212.45 ; 79.66,211.82 79.654,211.815 79.654,198.831 80.29,198.196 ; 79.66,211.82 79.66,199.15 80.29,198.52 80.29,198.196 ; 79.66,211.82 80.29,212.45
MEM_A14: "BANCO 1.24" "BANCO 2.24" "BANCO 3.24" "BANCO 4.24" U2.14 | length 147.6
  TopLayer w0.203: 81.535,253.85 81.535,251.225 80.905,250.595 80.905,237.925 81.535,237.295 81.535,234.8 81.535,232.175 80.905,231.545 80.905,218.875 81.535,218.245 81.535,215.075 81.535,212.425 ; 81.56,215.075 81.56,212.45 ; U2.14@126.245,212.966 126.245,211.57 121.499,206.824 108.549,206.824 108,206.275 108,193.65 103.425,189.075 86.062,189.075 81.581,193.556 81.581,195.197 81.581,196.854 81.56,196.854 ; 80.924,196.854 81.56,196.854 ; 80.924,196.854 80.924,211.785 80.93,211.79 ; 80.924,196.854 80.924,196.661 81.56,196.025 81.56,196.854 ; 80.93,211.79 81.535,212.395 ; 80.93,211.79 80.93,211.82 81.535,212.425 ; 80.93,211.79 80.93,199.15 81.56,198.52 81.56,196.854 ; 81.535,212.395 81.535,212.425 ; 81.535,212.395 81.56,212.42 81.56,212.45 ; 81.535,212.425 81.56,212.45
MEM_A15: "BANCO 1.32" "BANCO 2.32" "BANCO 3.32" "BANCO 4.32" U2.5 | length 114.7
  TopLayer w0.203: 91.695,253.85 91.695,251.225 91.065,250.595 91.065,237.925 91.695,237.295 91.695,234.8 91.695,232.2 91.065,231.57 91.065,219.285 91.72,218.63 91.72,215.075 91.72,211.225 91.095,210.6 91.09,210.595 91.09,199.15 91.72,198.52 91.72,195.197 91.72,193.598 91.741,193.577 ; 91.741,195.197 91.741,193.577 ; 101.975,191.7 101.95,191.675 ; U2.5@121.745,212.966 121.745,210.97 120.019,209.244 106.729,209.244 105.323,207.837 105.323,194.623 102.375,191.675 101.95,191.675 ; 91.741,193.577 91.741,193.566 93.632,191.675 93.643,191.675 ; 91.741,193.577 93.643,191.675 ; 93.643,191.675 101.95,191.675
MEM_A16: "BANCO 1.33" "BANCO 2.33" "BANCO 3.33" "BANCO 4.33" U2.4 | length 108.2
  TopLayer w0.203: 92.965,253.85 92.965,251.225 92.335,250.595 92.335,237.925 92.965,237.295 92.965,234.8 92.965,232.2 92.335,231.57 92.335,219.175 92.99,218.52 92.99,215.075 92.99,211.225 92.365,210.6 92.36,210.595 92.36,199.15 92.99,198.52 92.99,196.025 93.011,196.004 93.011,195.197 93.011,193.511 94.372,192.15 102.275,192.15 104.893,194.768 104.893,207.978 106.562,209.647 119.847,209.647 121.245,211.045 U2.4@121.245,212.966
MEM_A17: "BANCO 1.34" "BANCO 2.34" "BANCO 3.34" "BANCO 4.34" U2.3 | length 106
  TopLayer w0.203: 93.605,250.595 93.627,250.617 ; 94.235,253.85 94.235,251.225 93.627,250.617 ; U2.3@120.745,212.966 120.745,211.145 119.65,210.05 106.395,210.05 104.425,208.08 104.425,194.925 102.075,192.575 95.187,192.575 94.281,193.481 94.281,195.197 94.281,196.004 94.26,196.025 94.26,198.52 93.63,199.15 93.63,210.595 93.635,210.6 94.26,211.225 94.26,215.075 94.26,218.52 93.605,219.175 93.605,231.545 94.235,232.175 94.235,234.8 94.235,237.295 93.605,237.925 93.627,237.947 93.627,250.617
MEM_A18: "BANCO 1.35" "BANCO 2.35" "BANCO 3.35" "BANCO 4.35" U2.206 | length 101.5
  TopLayer w0.203: 94.875,231.645 94.906,231.677 ; 95.505,253.85 95.505,251.225 94.875,250.595 94.875,237.925 95.505,237.295 95.505,234.8 95.505,232.275 94.906,231.677 ; U2.206@117.595,216.116 111.891,216.116 103.95,208.175 103.95,195.025 101.925,193 95.95,193 95.551,193.399 95.551,195.197 95.551,196.004 95.53,196.025 95.53,198.52 94.9,199.15 94.9,210.525 ; 94.9,210.525 94.905,210.53 ; 94.9,210.525 94.905,210.53 ; 94.905,210.53 94.905,210.6 95.53,211.225 95.53,215.075 95.53,218.65 94.906,219.273 94.906,231.677
MEM_D0: "BANCO 1.7" U2.154 | length 54.9
  TopLayer w0.203: 89.155,263.45 89.155,265.02 92.16,268.025 102.675,268.025 104.775,265.925 104.775,250.25 107.925,247.1 108.5,247.1 110.825,244.775 120.225,244.775 120.745,244.255 U2.154@120.745,242.766
MEM_D1: "BANCO 1.8" MICRO.15 U2.153 | length 291.3
  TopLayer w0.203: 87.885,263.45 87.885,265.04 91.32,268.475 102.8,268.475 105.2,266.075 105.2,251.15 111.172,245.178 120.397,245.178 121.245,244.33 U2.153@121.245,242.766 ; MICRO.15@162.525,210.5 164.55,210.5 v1@165.25,211.2
  BottomLayer w0.2: v1(106.85,249.55) 111.075,253.775 111.075,255.975 109.575,257.475 86.575,257.475 85.5,258.55 85.5,276.5 88.175,279.175 175.3,279.175 178,276.475 178,258 174.275,254.275 162.875,254.275 156.9,248.3 156.9,238.125 165.075,229.95 v1(165.075,211.2)
MEM_D2: "BANCO 1.11" U2.152 | length 62.1
  TopLayer w0.203: 84.075,263.45 84.075,267.15 85.825,268.9 102.975,268.9 105.65,266.2 105.66,266.185 105.66,252.105 112.184,245.581 120.569,245.581 121.745,244.405 U2.152@121.745,242.766
MEM_D3: "BANCO 1.12" U2.151 | length 64.3
  TopLayer w0.203: 82.805,263.45 82.805,267.145 84.985,269.325 103.125,269.325 106.15,266.3 106.15,252.186 112.351,245.985 120.74,245.985 122.245,244.48 U2.151@122.245,242.766
MEM_D4: "BANCO 1.25" U2.168 | length 45.4
  TopLayer w0.203: v1(82.805,248.905) v1(82.805,248.925) 82.805,253.85 ; v1(99.6,247.05) 100.63,247.05 112.564,235.116 U2.168@117.595,235.116
  BottomLayer w0.203: v1(82.805,248.905) 84.66,247.05 v1(99.6,247.05)
MEM_D5: "BANCO 1.26" U2.167 | length 43.5
  TopLayer w0.203: v1(84.075,250.35) 84.075,253.85 ; v1(98,248.3) 98.025,248.325 99.925,248.325 112.634,235.616 U2.167@117.595,235.616
  BottomLayer w0.203: v1(84.075,250.35) 84.075,249.675 85.425,248.325 v1(98,248.3)
MEM_D6: "BANCO 1.29" U2.166 | length 40.5
  TopLayer w0.203: v1(87.875,249.55) v1(87.875,249.575) 87.885,249.585 87.885,253.85 ; v1(99.6,249.575) 100.725,249.575 101.39,248.91 101.39,247.435 112.709,236.116 U2.166@117.595,236.116
  BottomLayer w0.2: v1(87.875,249.575) v1(87.875,249.55) 99.525,249.575 v1(99.6,249.575)
MEM_D7: "BANCO 1.30" U2.165 | length 38.8
  TopLayer w0.203: v1(89.125,251.525) 89.155,251.555 89.155,251.8 v1@89.155,251.83 ; v1(89.125,251.8) v1@89.155,251.83 ; 89.155,253.85 v1@89.155,251.83 ; v1(98.85,251.5) 100.475,251.5 101.794,250.181 101.794,247.606 112.784,236.616 U2.165@117.595,236.616
  BottomLayer w0.2: v1(89.125,251.525) v1(89.125,251.8)
  BottomLayer w0.203: v1(89.125,251.525) v1(98.85,251.5)
MEM_D8: "BANCO 2.7" U2.172 | length 34.9
  TopLayer w0.203: v1(88.775,242.325) 89.155,242.705 89.155,244.4 ; v1(101.6,242.3) 102,242.3 111.184,233.116 U2.172@117.595,233.116
  BottomLayer w0.2: v1(88.775,242.325) 88.825,242.325 v1@88.85,242.3
  BottomLayer w0.203: v1@88.85,242.3 v1(101.6,242.3)
MEM_D9: "BANCO 2.8" U2.173 | length 37.8
  TopLayer w0.203: v1(87.6,241.1) 87.6,243.2 87.85,243.45 ; 87.85,244.35 87.85,243.45 ; 87.885,244.4 87.885,243.459 87.859,243.459 87.85,243.45 ; v1(99.8,241.1) 102.375,241.1 110.859,232.616 U2.173@117.595,232.616
  BottomLayer w0.203: v1(87.6,241.1) v1(99.8,241.1)
MEM_D10: "BANCO 2.11" U2.174 | length 40.3
  TopLayer w0.203: 84.075,244.4 84.075,242.175 v1(84.15,242.1) ; v1(101.725,240.125) 109.734,232.116 U2.174@117.595,232.116
  BottomLayer w0.203: v1(84.15,242.1) 84.15,241.45 85.525,240.075 v1(101.725,240.125)
MEM_D11: "BANCO 2.12" U2.175 | length 42.5
  TopLayer w0.203: 82.805,244.4 82.805,240.67 v1(82.9,240.575) ; v1(99.725,238.9) 102.375,238.9 109.675,231.6 U2.175@117.579,231.6
  BottomLayer w0.2: v1(99.725,238.9) v1@99.725,239.15
  BottomLayer w0.203: v1(82.9,240.575) 84.325,239.15 99.725,239.15 v1@99.825,239.15
MEM_D12: "BANCO 2.25" U2.181 | length 40.9
  TopLayer w0.203: v1(82.755,229.905) v1(82.755,229.925) 82.755,234.8 ; 82.755,234.85 82.755,234.8 ; 82.805,234.8 82.755,234.8 ; v1(99.35,227.975) 106.525,227.975 107.166,228.616 U2.181@117.595,228.616
  BottomLayer w0.2: 84.61,228.05 99.275,227.975 v1(99.35,227.975)
  BottomLayer w0.203: v1(82.755,229.905) 84.61,228.05
MEM_D13: "BANCO 2.26" U2.180 | length 38.4
  TopLayer w0.203: v1(84.025,231.35) 84.025,234.8 ; 84.025,234.85 84.025,234.8 ; 84.075,234.8 84.025,234.8 ; v1(101.025,229.275) 106.95,229.275 107.109,229.116 U2.180@117.595,229.116
  BottomLayer w0.2: 84.025,230.675 v1(84.025,231.35)
  BottomLayer w0.203: 84.025,230.675 85.375,229.325 v1(101.025,229.275)
MEM_D14: "BANCO 2.29" U2.179 | length 34.5
  TopLayer w0.203: v1(87.833,230.558) v1(87.825,230.55) 87.825,230.558 87.825,230.575 87.835,230.585 87.835,234.8 ; 87.835,234.85 87.835,234.8 ; 87.885,234.8 87.835,234.8 ; v1(99.275,230.55) 106.425,230.55 107.359,229.616 U2.179@117.595,229.616
  BottomLayer w0.2: v1(87.825,230.55) v1(87.833,230.558)
  BottomLayer w0.203: v1(87.825,230.55) 87.833,230.55 v1(99.275,230.55)
MEM_D15: "BANCO 2.30" U2.178 | length 32.2
  TopLayer w0.203: v1(89.075,232.525) v1(89.075,232.8) 89.105,232.83 89.105,234.8 ; 89.105,234.85 89.105,234.8 ; 89.155,234.8 89.105,234.8 ; v1(99.35,232.525) 105.375,232.525 107.784,230.116 U2.178@117.595,230.116
  BottomLayer w0.2: v1(89.075,232.525) v1(89.075,232.8)
  BottomLayer w0.203: v1(89.075,232.525) v1(99.35,232.525)
MEM_D16: "BANCO 3.7" U2.188 | length 32.2
  TopLayer w0.203: v1(88.725,222.575) 89.18,223.03 89.18,224.675 ; v1(99.6,222.575) 104.75,222.575 107.291,225.116 U2.188@117.595,225.116
  BottomLayer w0.203: v1(88.725,222.575) v1(99.6,222.575)
MEM_D17: "BANCO 3.8" U2.189 | length 34.7
  TopLayer w0.203: v1(87.625,221.375) 87.625,224.39 87.91,224.675 ; v1(101.525,221.375) 104.175,221.375 107.416,224.616 U2.189@117.595,224.616
  BottomLayer w0.203: v1(87.625,221.375) v1(101.525,221.375)
MEM_D18: "BANCO 3.11" U2.191 | length 38.4
  TopLayer w0.203: 84.1,224.675 v1@84.1,222.45 ; v1(84.175,222.098) 84.1,222.173 84.1,222.375 v1@84.1,222.45 ; v1(84.175,222.375) v1@84.1,222.45 ; v1(99.4,220.4) 104.105,220.4 107.321,223.616 U2.191@117.595,223.616
  BottomLayer w0.2: v1@84.175,221.725 v1(84.175,222.098)
  BottomLayer w0.203: v1@84.175,221.725 85.55,220.35 v1(99.4,220.4)
MEM_D19: "BANCO 3.12" U2.192 | length 40.7
  TopLayer w0.203: 82.83,224.675 82.83,220.945 v1(82.925,220.85) ; v1(101.6,219.425) 103.7,219.425 107.391,223.116 U2.192@117.595,223.116
  BottomLayer w0.203: v1(82.925,220.85) 84.35,219.425 v1(101.6,219.425)
MEM_D20: "BANCO 3.25" U2.200 | length 45.1
  TopLayer w0.203: v1(82.805,210.13) v1(82.805,210.15) 82.805,215.075 ; v1(99.225,208.2) 110.141,219.116 U2.200@117.595,219.116
  BottomLayer w0.2: v1(99.225,208.2) v1@99.225,208.275
  BottomLayer w0.203: v1(82.805,210.13) 84.66,208.275 99.225,208.275 v1@99.25,208.275
MEM_D21: "BANCO 3.26" U2.199 | length 81.6
  TopLayer w0.203: v1(84.075,211.575) 84.075,215.075 ; v1(98.222,209.55) 98.225,209.55 99.103,209.55 ; U2.199@117.595,219.616 109.191,219.616 ; 99.103,209.55 109.169,219.616 109.191,219.616 ; 99.103,209.55 99.125,209.55 109.191,219.616
  BottomLayer w0.2: 84.075,210.9 85.425,209.55 ; v1(98.222,209.55) 86.1,209.55 85.425,209.55 ; v1(98.225,209.45) 98.222,209.45 85.525,209.45 85.425,209.55
  BottomLayer w0.203: 85.425,209.55 v1@98.175,209.525
MEM_D22: "BANCO 3.29" U2.195 | length 35.1
  TopLayer w0.203: 87.91,215.075 87.91,213.965 v1(89.1,212.775) ; v1(100.325,212.75) v1(100.325,212.775) 109.166,221.616 U2.195@117.595,221.616
  BottomLayer w0.2: v1(100.325,212.75) v1(100.325,212.775)
  BottomLayer w0.203: v1(89.1,212.775) v1(100.325,212.75) v1@100.425,212.75
MEM_D23: "BANCO 3.30" U2.194 | length 44.5
  TopLayer w0.203: 89.18,215.075 89.18,217.28 v1(89.2,217.3) ; v1(101,217.2) 104.18,217.2 109.096,222.116 U2.194@117.595,222.116
  BottomLayer w0.2: v1(89.2,217.3) 100.9,217.3 v1(101,217.2)
  BottomLayer w0.203: v1(89.2,217.3) v1@101,217.3
MEM_D24: "BANCO 4.7" U2.201 | length 85.8
  TopLayer w0.203: v1(88.8,202.85) 88.8,204.417 89.18,204.797 ; v1@89.18,203.23 89.18,204.797 ; 89.18,204.925 89.18,204.797 ; v1(100.5,202.794) 100.506,202.8 100.525,202.8 100.525,202.825 100.525,202.921 100.525,208.575 100.533,208.583 ; v1(100.533,202.921) 100.533,208.583 ; U2.201@117.595,218.616 110.566,218.616 ; 100.533,208.583 110.566,218.616 ; 100.533,208.583 100.533,208.608 110.541,218.616 110.566,218.616
  BottomLayer w0.2: v1(88.8,202.85) 100.463,202.85 100.469,202.856 v1(100.533,202.921) ; v1@88.875,202.825 88.906,202.794 100.469,202.794 100.475,202.8 100.484,202.809 v1(100.5,202.825) ; v1(100.5,202.794) v1@100.5,202.8
  BottomLayer w0.203: v1@88.875,202.825 100.475,202.8 100.5,202.8 v1@100.525,202.8